# EAGLE board shield9Routed (EAGLE 8.7.1)
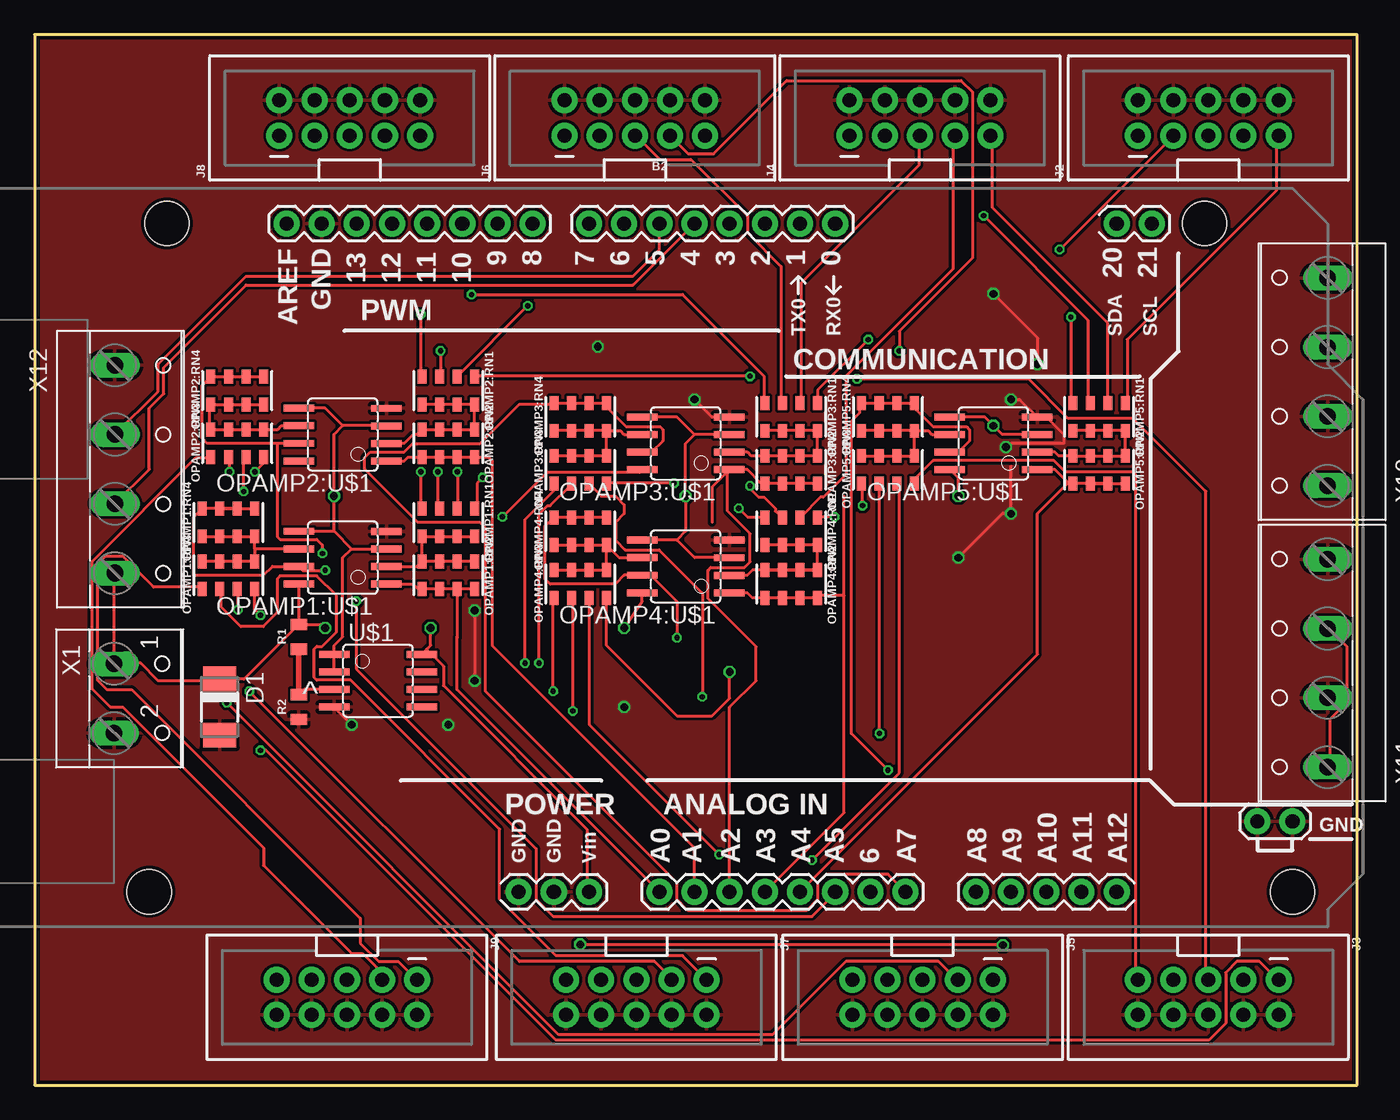
[diagram p0: board, top side]
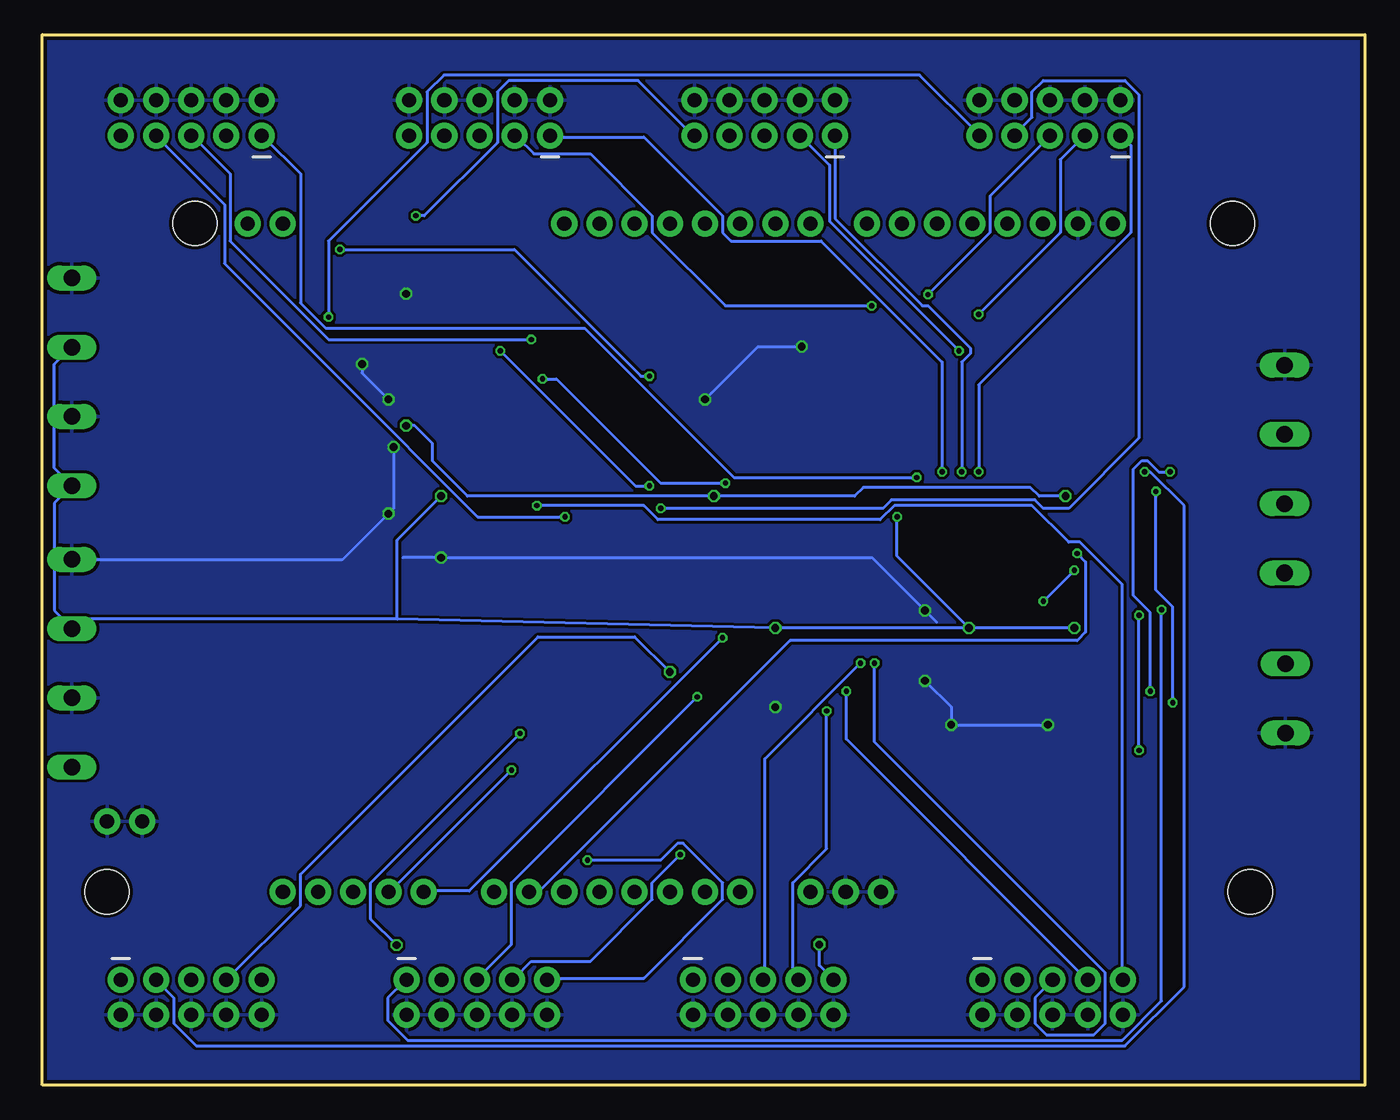
[diagram p1: board, bottom side, seen from below]

Size 95.5 x 75.87 mm. Coordinates in mm from the lower left corner, seen from the top.
Outline: 0,0 95.5,0 95.5,75.87 0,75.87 0,0
Copper layers (1*16): Top 0.035mm / dielectric 1.5mm / Bottom 0.035mm
Design rules "Dirty8TS *": minimum track width 5mil, minimum drill 12mil, track to track 8mil, track to pad 8mil, pad to pad 8mil, via to via 8mil, smd to smd 0mil, copper to edge 10mil, drill to drill 10mil, minimum pad ring 10mil, minimum via ring 6mil, stop-mask expansion 2mil, vias tented up to drill 25mil, thermal gap 10mil
Net classes: 0 default: width 0.203 mm, drill 0.381 mm, clearance 0.203 mm

## Footprints (pad centres in the part's own frame; a part is rotated, then mirrored left to right if it is on the bottom)
ARDUINO_MEGA_EDIT = drill 1.016 pad 1.88: 0 13.97,24.13; 1 11.43,24.13; 2 8.89,24.13; 3 6.35,24.13; 4 3.81,24.13; 5 1.27,24.13; 6 -1.27,24.13; 7 -3.81,24.13; 8 -7.874,24.13; 9 -10.414,24.13; 10 -12.954,24.13; 11 -15.494,24.13; 12 -18.034,24.13; 13 -20.574,24.13; 20 34.29,24.13; 21 36.83,24.13; A0 1.27,-24.13; A1 3.81,-24.13; A2 6.35,-24.13; A3 8.89,-24.13; A4 11.43,-24.13; A5 13.97,-24.13; A6 16.51,-24.13; A7 19.05,-24.13; A8 24.13,-24.13; A9 26.67,-24.13; A10 29.21,-24.13; A11 31.75,-24.13; A12 34.29,-24.13; AREF -25.654,24.13; GND@0 -8.89,-24.13; GND@1 -6.35,-24.13; GND@2 44.45,-19.05; GND@3 46.99,-19.05; GND@4 -23.114,24.13; VIN -3.81,-24.13 | hole 3.2: -34.29,24.13; -35.56,-24.13; 40.64,24.13; 46.99,-24.13
DO-214AC = smd 1.8 x 2.4: A 2.025,0; C -2.025,0
2X5-SHROUDED = drill 1.016 pad 1.88: 1 -1.27,5.08; 2 1.27,5.08; 3 -1.27,2.54; 4 1.27,2.54; 5 -1.27,0; 6 1.27,0; 7 -1.27,-2.54; 8 1.27,-2.54; 9 -1.27,-5.08; 10 1.27,-5.08
0805-ARV_EDIT10K = smd 0.65 x 1: 1 -1.905,-1; 2 -0.635,-1; 3 0.635,-1; 4 1.905,-1; 5 1.905,1; 6 0.635,1; 7 -0.635,1; 8 -1.905,1
SOIC8 = smd 0.5 x 2.2: 1 -1.905,-3.154; 2 -0.645,-3.154; 3 0.625,-3.154; 4 1.895,-3.154; 5 1.905,3.154; 6 0.635,3.154; 7 -0.635,3.154; 8 -1.905,3.154
0805 = smd 0.8 x 1.2: 1 -0.9,0; 2 0.9,0
W237-102 = drill 1.194 long: 1 -2.5,-1.27; 2 2.5,-1.27
W237-4 = drill 1.194 long: 1 -7.5,-1.27; 2 -2.5,-1.27; 3 2.5,-1.27; 4 7.5,-1.27

## Placement (x,y rotation side)
B2  ARDUINO_MEGA_R3_EDIT  [ARDUINO_MEGA_EDIT]  43.84,38.1 0 top
D1  [DO-214AC]  13.36,27.3 270 top
J2  AVR_SPI_PROG_5X2_NEWPTH2  [2X5-SHROUDED]  84.75,69.85 90 top
J3  AVR_SPI_PROG_5X2_NEWPTH2  [2X5-SHROUDED]  84.75,6.35 270 top
J4  AVR_SPI_PROG_5X2_NEWPTH2  [2X5-SHROUDED]  63.93,69.85 90 top
J5  AVR_SPI_PROG_5X2_NEWPTH2  [2X5-SHROUDED]  64.12,6.35 270 top
J6  AVR_SPI_PROG_5X2_NEWPTH2  [2X5-SHROUDED]  43.34,69.85 90 top
J7  AVR_SPI_PROG_5X2_NEWPTH2  [2X5-SHROUDED]  43.45,6.35 270 top
J8  AVR_SPI_PROG_5X2_NEWPTH2  [2X5-SHROUDED]  22.75,69.85 90 top
J9  AVR_SPI_PROG_5X2_NEWPTH2  [2X5-SHROUDED]  22.55,6.35 270 top
OPAMP1:RN1  10k  [0805-ARV_EDIT10K]  29.87,40.64 180 top
OPAMP1:RN2  10k  [0805-ARV_EDIT10K]  29.87,36.83 180 top
OPAMP1:RN3  10k  [0805-ARV_EDIT10K]  14,36.83 0 top
OPAMP1:RN4  10k  [0805-ARV_EDIT10K]  14,40.64 0 top
OPAMP1:U$1  MCP6002SMT  [SOIC8]  22.25,38.1 90 top
OPAMP2:RN1  10k  [0805-ARV_EDIT10K]  29.87,50.16 180 top
OPAMP2:RN2  10k  [0805-ARV_EDIT10K]  29.87,46.35 180 top
OPAMP2:RN3  10k  [0805-ARV_EDIT10K]  14.63,46.35 0 top
OPAMP2:RN4  10k  [0805-ARV_EDIT10K]  14.63,50.16 0 top
OPAMP2:U$1  MCP6002SMT  [SOIC8]  22.25,46.99 90 top
OPAMP3:RN1  10k  [0805-ARV_EDIT10K]  54.64,48.26 180 top
OPAMP3:RN2  10k  [0805-ARV_EDIT10K]  54.64,44.45 180 top
OPAMP3:RN3  10k  [0805-ARV_EDIT10K]  39.4,44.45 0 top
OPAMP3:RN4  10k  [0805-ARV_EDIT10K]  39.4,48.26 0 top
OPAMP3:U$1  MCP6002SMT  [SOIC8]  47.02,46.35 90 top
OPAMP4:RN1  10k  [0805-ARV_EDIT10K]  54.64,40.01 180 top
OPAMP4:RN2  10k  [0805-ARV_EDIT10K]  54.64,36.2 180 top
OPAMP4:RN3  10k  [0805-ARV_EDIT10K]  39.4,36.2 0 top
OPAMP4:RN4  10k  [0805-ARV_EDIT10K]  39.4,40.01 0 top
OPAMP4:U$1  MCP6002SMT  [SOIC8]  47.02,37.47 90 top
OPAMP5:RN1  10k  [0805-ARV_EDIT10K]  76.86,48.26 180 top
OPAMP5:RN2  10k  [0805-ARV_EDIT10K]  76.86,44.45 180 top
OPAMP5:RN3  10k  [0805-ARV_EDIT10K]  61.62,44.45 0 top
OPAMP5:RN4  10k  [0805-ARV_EDIT10K]  61.62,48.26 0 top
OPAMP5:U$1  MCP6002SMT  [SOIC8]  69.24,46.35 90 top
R1  1k  [0805]  19.07,32.38 90 top
R2  1k  [0805]  19.07,27.3 90 top
U$1  MCP6002SMT  [SOIC8]  24.79,29.21 270 top
X1  [W237-102]  7.01,27.94 270 top
X10  [W237-4]  92.1,50.8 90 top
X11  [W237-4]  92.1,30.48 90 top
X12  [W237-4]  7.07,44.49 270 top

## Library data of the parts
B2 = SparkFun-Boards
D1 = diode
J2-J9 = SparkFun-Connectors; PROD_ID: CONN-08671; SF_ID: PRT-08506
OPAMP1:RN1-OPAMP1:RN4 OPAMP2:RN1-OPAMP2:RN4 OPAMP3:RN1-OPAMP3:RN4 OPAMP4:RN1-OPAMP4:RN4 OPAMP5:RN1-OPAMP5:RN4 R1 R2 = SparkFun-Resistors
OPAMP1:U$1 OPAMP2:U$1 OPAMP3:U$1 OPAMP4:U$1 OPAMP5:U$1 U$1 = adam - ics
X1 = con-wago-500; MPN: 237-102; OC_FARNELL: unknown; OC_NEWARK: 70K9898
X10-X12 = con-wago-500; OC_FARNELL: unknown; OC_NEWARK: unknown

## Nets
+5V: B2.VIN D1.C OPAMP1:U$1.8 OPAMP3:U$1.8 OPAMP4:U$1.8 OPAMP5:U$1.8 R1.2 U$1.8 X1.1 X10.1 X10.3 X11.1 X11.3 X12.4
A1O: B2.A0 OPAMP1:RN2.5 OPAMP1:RN2.6 OPAMP1:RN2.7 OPAMP1:RN2.8 OPAMP1:U$1.1
A2O: B2.A1 OPAMP2:RN2.5 OPAMP2:RN2.6 OPAMP2:RN2.7 OPAMP2:RN2.8 OPAMP2:U$1.1
A3O: B2.A2 OPAMP3:RN2.5 OPAMP3:RN2.6 OPAMP3:RN2.7 OPAMP3:RN2.8 OPAMP3:U$1.1
A4O: B2.A3 OPAMP4:RN2.5 OPAMP4:RN2.6 OPAMP4:RN2.7 OPAMP4:RN2.8 OPAMP4:U$1.1
A5O: B2.A4 OPAMP5:RN2.5 OPAMP5:RN2.6 OPAMP5:RN2.7 OPAMP5:RN2.8 OPAMP5:U$1.1
A6O: B2.A5 OPAMP1:RN4.5 OPAMP1:RN4.6 OPAMP1:RN4.7 OPAMP1:RN4.8 OPAMP1:U$1.7
A7O: B2.A6 OPAMP2:RN4.5 OPAMP2:RN4.6 OPAMP2:RN4.7 OPAMP2:RN4.8 OPAMP2:U$1.7
A8O: B2.A7 OPAMP3:RN4.5 OPAMP3:RN4.6 OPAMP3:RN4.7 OPAMP3:RN4.8 OPAMP3:U$1.7
A9O: B2.A8 OPAMP4:RN4.5 OPAMP4:RN4.6 OPAMP4:RN4.7 OPAMP4:RN4.8 OPAMP4:U$1.7
A10O: B2.A9 OPAMP5:RN4.5 OPAMP5:RN4.6 OPAMP5:RN4.7 OPAMP5:RN4.8 OPAMP5:U$1.7
CI: B2.4 X12.3
DI: B2.5 X12.2
GND: B2.GND@0 B2.GND@1 B2.GND@2 B2.GND@3 B2.GND@4 D1.A J2.2 J2.4 J2.6 J2.8 J2.10 J3.2 J3.4 J3.6 J3.8 J3.10 J4.2 J4.4 J4.6 J4.8 J4.10 J5.2 J5.4 J5.6 J5.8 J5.10 J6.2 J6.4 J6.6 J6.8 J6.10 J7.2 J7.4 J7.6 J7.8 J7.10 J8.2 J8.4 J8.6 J8.8 J8.10 J9.2 J9.4 J9.6 J9.8 J9.10 OPAMP1:U$1.4 OPAMP2:U$1.4 OPAMP3:U$1.4 OPAMP4:U$1.4 OPAMP5:U$1.4 R2.1 U$1.4 X1.2 X10.2 X10.4 X11.2 X11.4 X12.1
N$2: R1.1 R2.2 U$1.3
OPAMP1:N$1: OPAMP1:RN3.5 OPAMP1:RN3.6 OPAMP1:RN3.7 OPAMP1:RN3.8 OPAMP1:RN4.1 OPAMP1:RN4.2 OPAMP1:RN4.3 OPAMP1:RN4.4 OPAMP1:U$1.6
OPAMP1:N$2: OPAMP1:RN1.5 OPAMP1:RN1.6 OPAMP1:RN1.7 OPAMP1:RN1.8 OPAMP1:RN2.1 OPAMP1:RN2.2 OPAMP1:RN2.3 OPAMP1:RN2.4 OPAMP1:U$1.2
OPAMP2:N$1: OPAMP2:RN3.5 OPAMP2:RN3.6 OPAMP2:RN3.7 OPAMP2:RN3.8 OPAMP2:RN4.1 OPAMP2:RN4.2 OPAMP2:RN4.3 OPAMP2:RN4.4 OPAMP2:U$1.6
OPAMP2:N$2: OPAMP2:RN1.5 OPAMP2:RN1.6 OPAMP2:RN1.7 OPAMP2:RN1.8 OPAMP2:RN2.1 OPAMP2:RN2.2 OPAMP2:RN2.3 OPAMP2:RN2.4 OPAMP2:U$1.2
OPAMP3:N$1: OPAMP3:RN3.5 OPAMP3:RN3.6 OPAMP3:RN3.7 OPAMP3:RN3.8 OPAMP3:RN4.1 OPAMP3:RN4.2 OPAMP3:RN4.3 OPAMP3:RN4.4 OPAMP3:U$1.6
OPAMP3:N$2: OPAMP3:RN1.5 OPAMP3:RN1.6 OPAMP3:RN1.7 OPAMP3:RN1.8 OPAMP3:RN2.1 OPAMP3:RN2.2 OPAMP3:RN2.3 OPAMP3:RN2.4 OPAMP3:U$1.2
OPAMP4:N$1: OPAMP4:RN3.5 OPAMP4:RN3.6 OPAMP4:RN3.7 OPAMP4:RN3.8 OPAMP4:RN4.1 OPAMP4:RN4.2 OPAMP4:RN4.3 OPAMP4:RN4.4 OPAMP4:U$1.6
OPAMP4:N$2: OPAMP4:RN1.5 OPAMP4:RN1.6 OPAMP4:RN1.7 OPAMP4:RN1.8 OPAMP4:RN2.1 OPAMP4:RN2.2 OPAMP4:RN2.3 OPAMP4:RN2.4 OPAMP4:U$1.2
OPAMP5:N$1: OPAMP5:RN3.5 OPAMP5:RN3.6 OPAMP5:RN3.7 OPAMP5:RN3.8 OPAMP5:RN4.1 OPAMP5:RN4.2 OPAMP5:RN4.3 OPAMP5:RN4.4 OPAMP5:U$1.6
OPAMP5:N$2: OPAMP5:RN1.5 OPAMP5:RN1.6 OPAMP5:RN1.7 OPAMP5:RN1.8 OPAMP5:RN2.1 OPAMP5:RN2.2 OPAMP5:RN2.3 OPAMP5:RN2.4 OPAMP5:U$1.2
S1A: J2.1 OPAMP1:RN1.1
S1B: J3.1 OPAMP1:RN3.4
S2A: J2.3 OPAMP2:RN1.1
S2B: J3.3 OPAMP2:RN3.4
S3A: J2.5 OPAMP3:RN1.1
S3B: J3.5 OPAMP3:RN3.4
S4A: J2.7 OPAMP4:RN1.1
S4B: J3.7 OPAMP4:RN3.4
S5A: J2.9 OPAMP5:RN1.1
S5B: J3.9 OPAMP5:RN3.4
S6A: J4.1 OPAMP1:RN1.2
S6B: J5.1 OPAMP1:RN3.3
S7A: J4.3 OPAMP2:RN1.2
S7B: J5.3 OPAMP2:RN3.3
S8A: J4.5 OPAMP3:RN1.2
S8B: J5.5 OPAMP3:RN3.3
S9A: J4.7 OPAMP4:RN1.2
S9B: J5.7 OPAMP4:RN3.3
S10A: J4.9 OPAMP5:RN1.2
S10B: J5.9 OPAMP5:RN3.3
S11A: J6.1 OPAMP1:RN1.3
S11B: J7.1 OPAMP1:RN3.2
S12A: J6.3 OPAMP2:RN1.3
S12B: J7.3 OPAMP2:RN3.2
S13A: J6.5 OPAMP3:RN1.3
S13B: J7.5 OPAMP3:RN3.2
S14A: J6.7 OPAMP4:RN1.3
S14B: J7.7 OPAMP4:RN3.2
S15A: J6.9 OPAMP5:RN1.3
S15B: J7.9 OPAMP5:RN3.2
S16A: J8.1 OPAMP1:RN1.4
S16B: J9.1 OPAMP1:RN3.1
S17A: J8.3 OPAMP2:RN1.4
S17B: J9.3 OPAMP2:RN3.1
S18A: J8.5 OPAMP3:RN1.4
S18B: J9.5 OPAMP3:RN3.1
S19A: J8.7 OPAMP4:RN1.4
S19B: J9.7 OPAMP4:RN3.1
S20A: J8.9 OPAMP5:RN1.4
S20B: J9.9 OPAMP5:RN3.1
VCC: OPAMP2:U$1.8
VREF: OPAMP1:U$1.3 OPAMP1:U$1.5 OPAMP2:U$1.3 OPAMP2:U$1.5 OPAMP3:U$1.3 OPAMP3:U$1.5 OPAMP4:U$1.3 OPAMP4:U$1.5 OPAMP5:U$1.3 OPAMP5:U$1.5 U$1.1 U$1.2

## Tracks (layer width: path | path; a pad name or v marks a point on that pad's centre or on a via)
+5V  (via drill 0.38, 0.56)
  Top 0.203: R1.2 15.12,29.33 D1.C 13.24,29.21 8.91,29.21 7.64,30.48 5.78,30.48 X1.1 5.74,36.94 X12.4 | R1.2 19.1,33.31 OPAMP1:U$1.8 | v42.57,33.02 43.86,34.95 OPAMP4:U$1.8 | v66.7,42.55 66.7,43.84 OPAMP5:U$1.8 | U$1.8 28.31,31.48 | 28.31,31.48 28.6,31.77 v28.6,33.02 | R1.2 20.71,33.28 v20.98,33.02 | v33.78,41.05 37.03,44.3 43.74,44.3 OPAMP3:U$1.8 | X11.1 93.52,23.16 93.52,26.42 94.74,27.64 94.74,31.7 93.52,32.92 X11.3 | 28.31,31.48 29.51,30.28 29.51,28.85 39.88,18.49 39.88,14.02 B2.VIN | 28.3,31.5 28.31,31.48
  Top 0.406: 12.94,29.75 D1.C
  Bottom 0.203: v20.98,33.02 v28.6,33.02 | v28.6,33.02 v42.57,33.02 69.88,33.66 | 69.88,33.66 92.69,33.66 93.35,33 | 93.35,33 X11.3 | 93.35,33 94.64,34.29 94.64,42.03 X10.1 94.64,44.57 94.64,52.07 93.41,53.3 X10.3 | 69.88,33.66 69.88,39.37 v66.7,42.55 | v33.78,41.05 33.78,38.2 v28.6,33.02
A1O
  Top 0.203: OPAMP1:U$1.1 27.33,36.2 27.7,35.83 OPAMP1:RN2.5 OPAMP1:RN2.6 OPAMP1:RN2.7 | B2.A0 30.51,28.57 30.51,32.31 | 30.51,32.31 30.51,32.38 | OPAMP1:RN2.8 OPAMP1:RN2.7 | OPAMP1:RN2.7 30.53,35.76 30.53,32.31 30.51,32.31
A2O
  Top 0.203: B2.A1 47.65,17.14 33.05,31.75 33.05,45.09 32.77,45.35 OPAMP2:RN2.8 OPAMP2:RN2.7 OPAMP2:RN2.6 OPAMP2:RN2.5 26.97,45.35 26.7,45.09 OPAMP2:U$1.1
A3O
  Top 0.203: B2.A2 50.19,27.3 52.09,29.21 52.09,31.67 48.62,35.15 48.62,37.19 48.82,37.39 51.26,37.39 51.66,37.8 51.66,39.83 50.04,41.45 50.04,44.3 OPAMP3:U$1.1 | OPAMP3:RN2.8 OPAMP3:RN2.7 OPAMP3:RN2.6 OPAMP3:RN2.5 52.46,43.45 51.46,44.45 OPAMP3:U$1.1 | OPAMP3:U$1.1 48.92,43.2 48.92,40.64
A4O
  Top 0.203: B2.A3 58.44,19.68 58.44,35.36 | 58.44,35.36 58.44,42.55 | OPAMP4:U$1.1 51.46,35.56 51.83,35.2 OPAMP4:RN2.5 OPAMP4:RN2.6 OPAMP4:RN2.7 OPAMP4:RN2.8 56.54,35.36 58.44,35.36
A5O
  Top 0.203: B2.A4 72.42,31.11 72.42,41.27 74.59,43.45 OPAMP5:RN2.5 | OPAMP5:RN2.7 OPAMP5:RN2.5 | OPAMP5:RN2.6 OPAMP5:RN2.7 | OPAMP5:RN2.7 OPAMP5:RN2.8 | OPAMP5:RN2.5 74.69,43.45 73.69,44.45 OPAMP5:U$1.1
A6O  (via drill 0.38)
  Top 0.203: OPAMP1:RN4.7 OPAMP1:RN4.5 | OPAMP1:RN4.7 OPAMP1:RN4.8 11.45,41.01 11.45,36.83 16.54,36.83 17.17,37.47 OPAMP1:U$1.7 19.15,37.39 19.35,37.19 v20.98,37.19 | OPAMP1:RN4.6 OPAMP1:RN4.7 | v23.22,34.95 23.22,30.07 36.22,17.07 36.22,13.41 37.44,12.19 56.13,12.19 57.76,13.82 B2.A5
  Bottom 0.203: v20.98,37.19 v23.22,34.95
A7O  (via drill 0.38)
  Top 0.203: OPAMP2:RN4.5 OPAMP2:RN4.6 OPAMP2:RN4.7 OPAMP2:RN4.8 12.09,50.53 12.09,46.73 12.47,46.35 17.53,46.35 | OPAMP2:U$1.7 17.53,46.35 | v20.78,38.41 20.78,39.01 20.37,39.42 17.73,39.42 17.53,39.62 17.53,46.35
  Bottom 0.203: v20.78,38.41 20.17,37.8 20.17,32.72 20.78,32.11 41.5,32.11 59.59,14.02 60.2,14.02 B2.A6
A8O
  Top 0.203: OPAMP3:U$1.7 44.55,45.72 45.36,46.53 45.36,47.35 45.16,47.55 42.72,47.55 41.1,49.17 OPAMP3:RN4.5 OPAMP3:RN4.6 OPAMP3:RN4.7 OPAMP3:RN4.8 37.44,49.17 35,49.17 32.16,46.33 27.28,46.33 26.67,45.72 24.23,45.72 23.83,45.31 23.83,44.5 27.69,40.64 32.16,40.64 32.56,40.23 32.56,28.45 46.38,14.63 46.38,13.41 47.19,12.6 55.73,12.6 56.54,13.41 56.54,14.63 57.15,15.24 61.62,15.24 B2.A7
A9O  (via drill 0.38)
  Top 0.203: OPAMP4:RN4.5 OPAMP4:RN4.6 OPAMP4:RN4.7 OPAMP4:RN4.8 36.85,40.37 36.85,40.01 36.86,40 36.86,36.57 37.23,36.2 41.94,36.2 42.57,36.83 OPAMP4:U$1.7 43.94,36.78 44.55,36.78 46.38,34.95 v46.38,32.31
  Bottom 0.203: v46.38,32.31 64.67,14.02 67.92,14.02 B2.A8
A10O  (via drill 0.38)
  Top 0.203: OPAMP5:U$1.7 66.7,45.72 67.51,46.53 67.51,47.35 67.31,47.55 64.87,47.55 63.25,49.17 OPAMP5:RN4.5 OPAMP5:RN4.6 OPAMP5:RN4.7 OPAMP5:RN4.8 59.59,49.17 59.59,48.56 58.98,47.95 58.98,25.4 v61.62,22.76
  Bottom 0.203: v61.62,22.76 70.36,14.02 B2.A9
CI
  Top 0.203: X12.3 8.28,44.48 8.28,48.9 9.32,49.94 9.32,51.84 15.27,57.78 43.2,57.78 B2.4
DI
  Top 0.203: X12.2 8.91,50.11 8.91,52.07 15.27,58.42 43.2,58.42 45.11,60.33 B2.5
GND  (via drill 0.56)
  Top 0.203: v22.88,26.04 21.64,27.28 U$1.4 | v31.77,34.29 v31.77,29.21 | v66.7,38.1 69.88,41.27 v70.51,41.27 70.51,44.7 | v69.24,57.15 72.42,53.98 v72.42,52.07 | v70.51,49.53 71.11,49.53 OPAMP5:U$1.4 73.06,48.25 74.32,46.99 74.32,46.35 70.51,46.35 70.24,46.09 v70.14,46.09 | OPAMP3:U$1.4 48.93,48.25 v47.65,49.53
  Bottom 0.203: v22.88,26.04 v29.87,26.04 29.87,27.3 v31.77,29.21 | 69.47,38.1 v66.7,38.1 35.59,38.1 v31.77,34.29 30.91,33.43 | X11.4 73.81,37.98 v70.51,41.27 70.14,41.64 v70.14,46.09 | v72.42,52.07 72.42,51.44 v70.51,49.53 | v47.65,49.53 43.84,53.34 v40.66,53.34
  other vias: 42.57,27.3
  pour Bottom: 0,76 95.5,76 95.5,0 0,0
  pour Top: 0,76 95.5,76 95.5,0 0,0
N$2
  Top 0.203: U$1.3 21.63,28.57 19.45,28.57 R2.2
  Top 0.406: R2.2 R1.1
OPAMP1:N$1
  Top 0.203: OPAMP1:U$1.6 15.9,38.73 | 15.9,38.73 OPAMP1:RN4.4 OPAMP1:RN4.3 OPAMP1:RN4.2 OPAMP1:RN4.1 | 15.9,38.73 OPAMP1:RN3.5 OPAMP1:RN3.6 OPAMP1:RN3.7 OPAMP1:RN3.8
OPAMP1:N$2
  Top 0.203: OPAMP1:U$1.2 27.59,37.45 OPAMP1:RN2.4 | OPAMP1:RN2.4 OPAMP1:RN1.5 OPAMP1:RN1.6 OPAMP1:RN1.7 OPAMP1:RN1.8 | OPAMP1:RN2.1 OPAMP1:RN2.2 OPAMP1:RN2.3 OPAMP1:RN2.4
OPAMP2:N$1
  Top 0.203: OPAMP2:RN4.4 OPAMP2:RN4.3 OPAMP2:RN4.2 OPAMP2:RN4.1 12.65,48.97 12.65,47.55 OPAMP2:RN3.8 OPAMP2:RN3.7 OPAMP2:RN3.6 OPAMP2:RN3.5 17.54,47.35 17.8,47.62 OPAMP2:U$1.6
OPAMP2:N$2
  Top 0.203: OPAMP2:RN1.5 OPAMP2:RN1.6 OPAMP2:RN1.7 OPAMP2:RN1.8 OPAMP2:RN2.1 OPAMP2:RN2.2 OPAMP2:RN2.3 OPAMP2:RN2.4 27.6,46.99 27.33,46.99 26.69,46.34 OPAMP2:U$1.2
OPAMP3:N$1
  Top 0.203: OPAMP3:RN3.8 OPAMP3:RN3.7 OPAMP3:RN3.6 OPAMP3:RN3.5 OPAMP3:RN4.4 | OPAMP3:RN4.4 OPAMP3:RN4.3 OPAMP3:RN4.2 OPAMP3:RN4.1 | OPAMP3:RN4.4 42.3,47.26 42.57,46.99 OPAMP3:U$1.6
OPAMP3:N$2
  Top 0.203: OPAMP3:RN1.5 OPAMP3:RN1.6 OPAMP3:RN1.7 OPAMP3:RN1.8 OPAMP3:RN2.1 OPAMP3:RN2.2 OPAMP3:RN2.3 OPAMP3:RN2.4 51.73,45.45 51.46,45.72 OPAMP3:U$1.2
OPAMP4:N$1
  Top 0.203: OPAMP4:RN4.1 OPAMP4:RN4.2 OPAMP4:RN4.3 OPAMP4:RN4.4 | OPAMP4:RN3.8 OPAMP4:RN3.7 OPAMP4:RN3.6 OPAMP4:RN3.5 OPAMP4:RN4.4 | OPAMP4:RN4.4 42.2,38.1 OPAMP4:U$1.6
OPAMP4:N$2
  Top 0.203: OPAMP4:RN2.1 OPAMP4:RN2.2 OPAMP4:RN2.3 OPAMP4:RN2.4 | OPAMP4:RN2.4 OPAMP4:RN2.1 | OPAMP4:RN2.1 OPAMP4:RN1.8 OPAMP4:RN1.7 OPAMP4:RN1.6 OPAMP4:RN1.5 | OPAMP4:RN2.4 51.83,37.2 51.45,36.82 OPAMP4:U$1.2
OPAMP5:N$1
  Top 0.203: OPAMP5:RN3.8 OPAMP5:RN3.7 OPAMP5:RN3.6 OPAMP5:RN3.5 OPAMP5:RN4.4 | OPAMP5:RN4.4 OPAMP5:RN4.3 OPAMP5:RN4.2 OPAMP5:RN4.1 | OPAMP5:U$1.6 64.8,46.99 64.53,47.26 OPAMP5:RN4.4
OPAMP5:N$2
  Top 0.203: OPAMP5:RN1.5 OPAMP5:RN1.6 OPAMP5:RN1.7 OPAMP5:RN1.8 OPAMP5:RN2.1 OPAMP5:RN2.2 OPAMP5:RN2.3 OPAMP5:RN2.4 73.95,45.45 73.69,45.72 72.4,45.72 OPAMP5:U$1.2
S1A  (via drill 0.38)
  Top 0.203: v32.36,43.89 31.95,43.48 31.95,41.66 OPAMP1:RN1.1
  Bottom 0.203: v32.36,43.89 45.57,43.89 56.34,54.66 75.03,54.66 76.86,56.49 76.86,65.84 79.5,68.48 J2.1
S1B  (via drill 0.38)
  Top 0.203: OPAMP1:RN3.4 15.9,34.34 v16.31,33.93 | v16.31,24.18 16.71,24.18 37.64,3.25 84.78,3.25 86,4.47 86,8.13 86.82,8.94 88.44,8.94 89.66,7.72 J3.1
  Bottom 0.203: v16.31,24.18 v16.31,33.93
S2A  (via drill 0.38)
  Top 0.203: v51.66,51.21 31.95,51.21 OPAMP2:RN1.1 | v74.02,60.35 82.14,68.48 J2.3
  Bottom 0.203: v51.66,51.21 52.27,51.21 61.42,60.35 v74.02,60.35
S2B  (via drill 0.38)
  Top 0.203: v15.9,44.3 16.51,44.91 16.51,45.31 OPAMP2:RN3.4
  Bottom 0.203: v15.9,44.3 15.49,44.3 13.05,41.86 13.05,7.11 17.32,2.85 84.38,2.85 86,4.47 86,6.3 87.22,7.52 J3.3
S3A  (via drill 0.38)
  Top 0.203: OPAMP3:RN1.1 56.54,50.19 v60.2,53.85
  Bottom 0.203: v60.2,53.85 74.83,53.85 81.94,60.96 81.94,65.84 84.58,68.48 J2.5
S3B  (via drill 0.38)
  Top 0.203: v46.18,43.48 41.3,43.48 OPAMP3:RN3.4 | v59.39,51 71.78,51 74.62,48.16 79.3,48.16 84.58,42.88 84.58,7.72 J3.5
  Bottom 0.203: v46.18,43.48 50.85,43.48 58.37,51 v59.39,51
S4A  (via drill 0.38)
  Top 0.203: v57.76,41.05 56.54,41.05 OPAMP4:RN1.1
  Bottom 0.203: v57.76,41.05 64.06,41.05 74.07,51.05 82.35,59.33 82.35,63.6 87.22,68.48 J2.7
S4B  (via drill 0.56)
  Top 0.203: OPAMP4:RN3.4 41.3,31.75 46.38,26.67 48.92,26.67 50.19,27.94 v50.19,29.84
  Bottom 0.203: J3.7 76.86,12.97 76.86,15.24 59.72,32.38 52.73,32.38 v50.19,29.84
S5A
  Top 0.203: OPAMP5:RN1.1 78.89,49.38 78.89,53.85 89.66,64.62 89.66,68.48 J2.9
S5B
  Top 0.203: OPAMP5:RN3.4 63.65,43.48 63.65,43.89 64.87,45.11 73.61,45.11 74.42,44.3 79.3,44.3 79.5,44.09 79.5,7.72 J3.9
S6A  (via drill 0.38)
  Top 0.203: v30.53,44.3 30.53,41.66 OPAMP1:RN1.2
  Bottom 0.203: v30.53,44.3 30.53,52.22 39.27,60.96 45.77,60.96 46.38,61.57 46.38,62.79 52.07,68.48 58.78,68.48 J4.1
S6B  (via drill 0.38)
  Top 0.203: v14.68,34.34 14.68,35.76 OPAMP1:RN3.3
  Bottom 0.203: v14.68,34.34 14.68,6.1 17.53,3.25 69.14,3.25 70.56,4.67 70.56,6.3 69.34,7.52 J5.1
S7A  (via drill 0.38)
  Top 0.203: v35.61,56.29 30.53,51.21 OPAMP2:RN1.2
  Bottom 0.203: v35.61,56.29 46.18,56.29 51.46,61.57 51.46,62.79 55.93,67.26 59.99,67.26 61.21,68.48 J4.3
S7B  (via drill 0.38)
  Top 0.203: v15.09,42.88 15.09,45.31 OPAMP2:RN3.3 | v13.87,27.64 37.85,3.66 53.29,3.66 58.57,8.94 65.28,8.94 66.5,7.72 J5.3
  Bottom 0.203: v15.09,42.88 15.09,35.76 13.87,34.54 v13.87,27.64
S8A
  Top 0.203: OPAMP3:RN1.2 55.32,49.38 55.32,57.91 63.86,66.45 63.86,68.48 J4.5
S8B  (via drill 0.38)
  Top 0.203: v48.21,28.04 48.21,35.56 48.18,35.56 45.09,38.66 42.65,38.66 41.94,39.37 41.94,40.64 42.57,41.27 42.57,41.91 41.94,42.55 40.94,42.55 OPAMP3:RN3.3 40.08,43.28
  Bottom 0.203: v48.21,28.04 61.62,14.63 61.62,10.16 64.06,7.72 J5.5
S9A
  Top 0.203: OPAMP4:RN1.2 55.32,41.05 56.74,42.47 56.95,42.47 58.57,44.09 58.57,51.21 66.29,58.93 66.29,68.48 J4.7
S9B  (via drill 0.38)
  Top 0.203: v49.43,16.66 40.08,26.01 40.08,35.15 OPAMP4:RN3.3
  Bottom 0.203: v49.43,16.66 51.46,14.63 51.46,13.41 55.93,8.94 60.2,8.94 61.42,7.72 J5.7
S10A
  Top 0.203: OPAMP5:RN1.2 77.47,49.38 77.47,55.07 69.14,63.4 69.14,68.48 J4.9
S10B  (via drill 0.38)
  Top 0.203: v56.13,16.26 62.43,22.55 62.43,43.28 OPAMP5:RN3.3
  Bottom 0.203: v56.13,16.26 50.85,16.26 49.63,17.48 49.23,17.48 46.38,14.63 46.38,13.41 52.07,7.72 58.98,7.72 J5.9
S11A  (via drill 0.38)
  Top 0.203: v29.11,44.3 29.11,41.66 OPAMP1:RN1.3
  Bottom 0.203: v29.11,44.3 29.11,52.22 28.5,52.83 28.5,53.24 31.55,56.29 31.95,56.29 38.25,62.59 38.25,68.48 J6.1
S11B
  Top 0.203: OPAMP1:RN3.2 13.46,35.76 13.46,34.54 14.88,33.12 16.51,33.12 17.53,34.14 17.53,36.58 17.73,36.78 20.37,36.78 21.79,35.36 21.79,32.72 20.78,31.7 20.37,31.7 20.17,31.5 20.17,29.46 20.37,29.26 22.81,29.26 33.58,18.49 33.58,13.41 37.64,9.35 46.79,9.35 48.41,7.72 J7.1
S12A  (via drill 0.38)
  Top 0.203: v29.31,53.03 29.31,51.21 OPAMP2:RN1.3
  Bottom 0.203: v29.31,53.03 38.66,62.38 38.66,66.45 40.69,68.48 J6.3
S12B  (via drill 0.38)
  Top 0.203: v14.07,44.3 14.07,45.31 OPAMP2:RN3.2 | v15.49,28.45 35,8.94 44.75,8.94 45.97,7.72 J7.3
  Bottom 0.203: v14.07,44.3 14.88,44.3 15.7,45.11 16.1,45.11 16.71,44.5 16.71,35.36 15.49,34.14 v15.49,28.45
S13A
  Top 0.203: OPAMP3:RN1.3 53.9,49.38 53.9,59.13 51.46,61.57 51.46,62.79 47.4,66.85 45.16,66.85 43.53,68.48 J6.5
S13B  (via drill 0.38)
  Top 0.203: v36.42,30.48 36.42,41.25 37.03,41.86 37.24,41.86 38.66,43.28 OPAMP3:RN3.2
  Bottom 0.203: v36.42,30.48 43.33,23.57 43.33,7.72 J7.5
S14A  (via drill 0.38)
  Top 0.203: v51.66,43.28 51.66,43.08 52.27,42.47 52.68,42.47 53.49,41.66 53.49,41.45 53.9,41.05 OPAMP4:RN1.3 | v62.43,53.03 62.43,54.46 67.72,59.74 67.72,71.73 66.9,72.54 54.3,72.54 49.02,67.26 47.19,67.26 45.97,68.48 J6.7
  Bottom 0.203: v51.66,43.28 52.68,43.28 v62.43,53.03
S14B  (via drill 0.38)
  Top 0.203: v38.86,27.03 38.86,35.15 OPAMP4:RN3.2
  Bottom 0.203: v38.86,27.03 38.86,17.07 41.3,14.63 41.3,7.92 41.1,7.72 J7.7
S15A  (via drill 0.38)
  Top 0.203: v68.53,62.79 76.05,55.27 76.05,49.38 OPAMP5:RN1.3
  Bottom 0.203: v68.53,62.79 67.92,62.79 62.64,68.07 62.64,71.73 61.82,72.54 52.48,72.54 48.62,68.68 J6.9
S15B  (via drill 0.38, 0.56)
  Top 0.203: v61.01,25.4 61.01,43.28 OPAMP5:RN3.2 | v39.4,10.16 69.88,10.16 v69.91,10.12
  Bottom 0.203: v61.01,25.4 71.78,14.63 71.78,11.99 v69.91,10.12 | 38.25,7.52 J7.9 39.4,8.64 v39.4,10.16
S16A  (via drill 0.38)
  Top 0.203: v27.89,44.3 27.89,41.66 OPAMP1:RN1.4
  Bottom 0.203: v27.89,44.3 27.89,50.6 16.92,61.57 16.92,67.87 17.53,68.48 J8.1
S16B
  Top 0.203: OPAMP1:RN3.1 12.04,35.97 8.59,35.97 6.35,38.2 5.13,38.2 4.52,37.59 4.52,29.26 5.21,28.57 7.01,28.57 23.52,12.06 23.52,10.26 24.84,8.94 26.26,8.94 27.48,7.72 J9.1
S17A  (via drill 0.38)
  Top 0.203: v27.89,55.68 27.89,51.21 OPAMP2:RN1.4
  Bottom 0.203: v27.89,55.68 22,61.57 22,66.85 20.37,68.48 J8.3
S17B
  Top 0.203: OPAMP2:RN3.1 12.65,45.31 11.63,45.31 4.11,37.8 4.11,28.65 5.46,27.3 6.38,27.3 16.54,17.14 16.54,15.88 22.88,9.53 23.68,9.53 25.09,8.12 J9.3 25.04,7.72
S18A  (via drill 0.38)
  Top 0.203: v31.55,57.1 46.79,57.1 52.68,51.21 52.68,49.38 OPAMP3:RN1.4
  Bottom 0.203: v31.55,57.1 27.08,61.57 27.08,64.21 22.81,68.48 J8.5
S18B  (via drill 0.38)
  Top 0.203: v35.41,30.48 35.41,40.84 37.44,42.88 37.44,43.28 OPAMP3:RN3.1
  Bottom 0.203: v35.41,30.48 35.41,24.79 18.75,8.13 18.75,4.47 19.56,3.66 23.01,3.66 23.83,4.47 23.83,6.3 22.61,7.52 J9.5
S19A  (via drill 0.38)
  Top 0.203: v50.85,41.66 51.46,41.05 52.68,41.05 OPAMP4:RN1.4
  Bottom 0.203: v50.85,41.66 34.8,41.66 34.19,42.27 23.83,42.27 23.22,41.66 21.39,41.66 16.31,46.74 16.31,71.53 17.32,72.54 23.22,72.54 24.03,71.73 24.03,69.9 25.25,68.68 J8.7
S19B  (via drill 0.38)
  Top 0.203: v37.44,28.45 37.44,35.15 OPAMP4:RN3.1
  Bottom 0.203: v37.44,28.45 37.44,24.99 20.17,7.72 J9.7
S20A  (via drill 0.38)
  Top 0.203: v74.83,55.47 74.83,49.38 OPAMP5:RN1.4
  Bottom 0.203: v74.83,55.47 74.83,60.96 67.72,68.07 67.72,71.73 66.5,72.95 32.16,72.95 27.89,68.68 J8.9
S20B  (via drill 0.38)
  Top 0.203: v59.79,41.86 59.79,43.28 OPAMP5:RN3.1
  Bottom 0.203: v59.79,41.86 52.07,41.86 51.05,40.84 35,40.84 33.98,41.86 24.03,41.86 21.39,39.22 20.57,39.22 17.53,36.17 17.53,7.72 J9.9
VREF  (via drill 0.56)
  Top 0.203: OPAMP1:U$1.5 21.61,40.01 | 21.61,40.01 22.88,38.73 | 22.88,38.73 OPAMP1:U$1.3 | OPAMP5:U$1.3 69.88,46.99 v69.24,47.62 68.61,48.26 OPAMP5:U$1.5 | OPAMP2:U$1.3 22.25,47.62 | OPAMP2:U$1.5 20.98,48.9 22.25,47.62 | OPAMP4:U$1.3 50.16,38.1 47.65,38.1 46.38,39.37 | 46.38,39.37 OPAMP4:U$1.5 | OPAMP3:U$1.3 50.16,46.99 47.65,46.99 | 47.65,46.99 46.38,48.26 OPAMP3:U$1.5 | U$1.2 U$1.1 21.64,31.77 22.25,32.38 22.25,38.1 22.88,38.73 | 21.61,40.01 v21.61,42.55 21.61,46.99 22.25,47.62 | 46.38,39.37 47.02,40.01 v47.02,42.55 47.02,46.35 47.65,46.99
  Bottom 0.203: v21.61,42.55 23.52,42.55 24.16,43.18 36.22,43.18 36.85,42.55 v47.02,42.55 64.8,42.55 67.33,45.09 67.33,46.35 68.61,47.62 v69.24,47.62

## Text on the board
tPlace: ^